# EAGLE board ping_breakout (EAGLE 5.11)
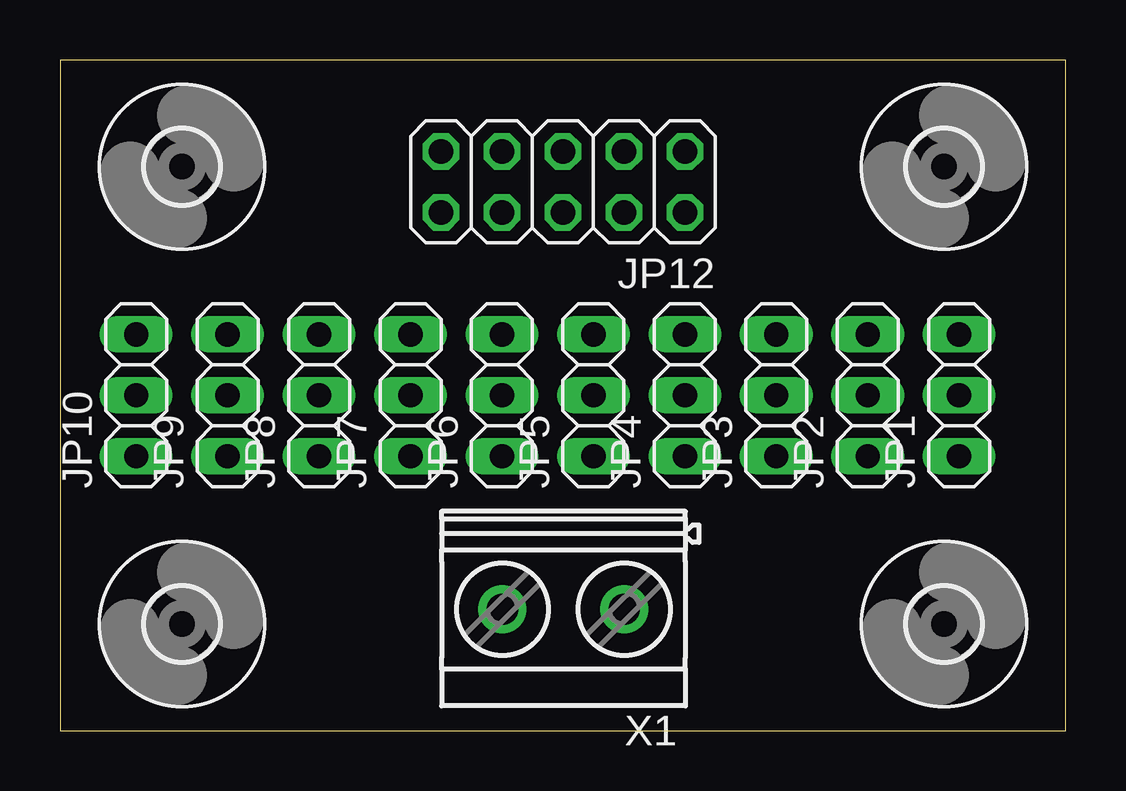
[diagram p0: board, top side]
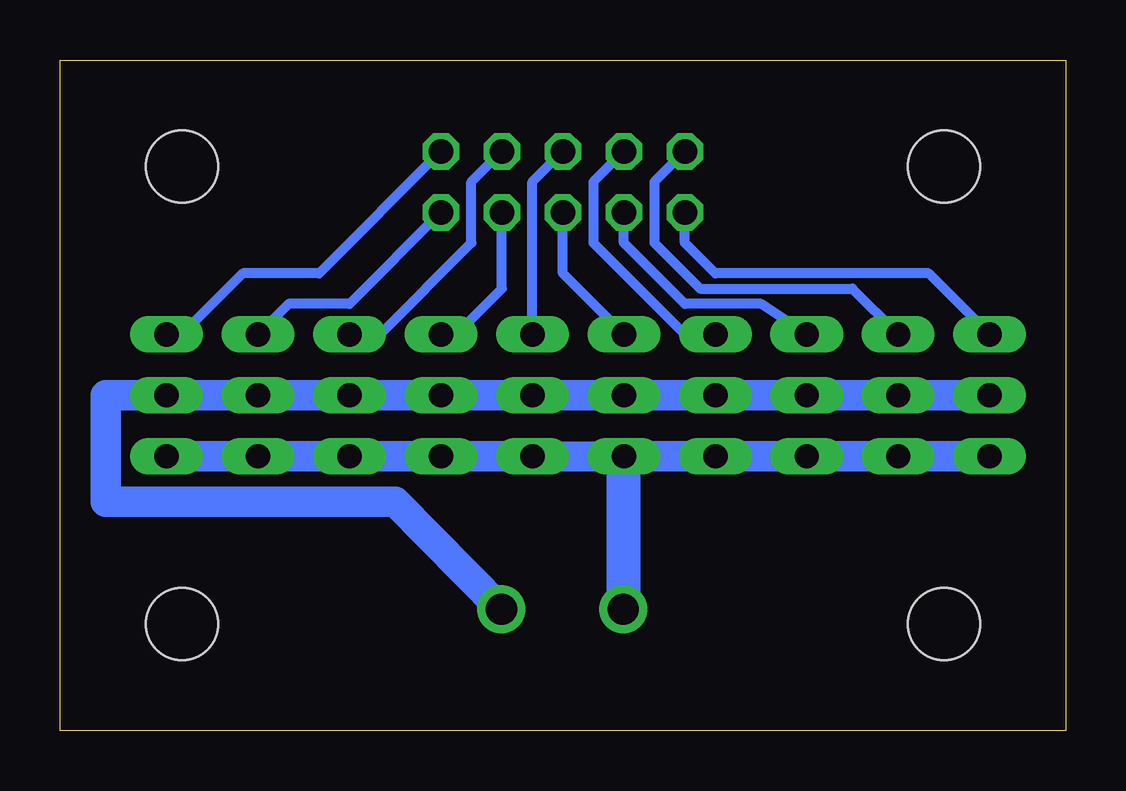
[diagram p1: board, bottom side, seen from below]

Size 41.91 x 27.94 mm. Coordinates in mm from the lower left corner, seen from the top.
Outline: 0,0 41.91,0 41.91,27.94 0,27.94 0,0
Copper layers (1*16): Top 0.035mm / dielectric 1.5mm / Bottom 0.035mm
Design rules "default": minimum track width 10mil, minimum drill 24mil, track to track 8mil, track to pad 8mil, pad to pad 8mil, via to via 8mil, smd to smd 8mil, copper to edge 40mil, drill to drill 8mil, minimum pad ring 10mil, minimum via ring 8mil, stop-mask expansion 4mil, vias tented up to drill 0mil, thermal gap 10mil

## Footprints (pad centres in the part's own frame; a part is rotated, then mirrored left to right if it is on the bottom)
1X03 = drill 1.016 long: 1 -2.54,0; 2 0,0; 3 2.54,0
2X05 = drill 1.016 octagon: 1 -5.08,-1.27; 2 -5.08,1.27; 3 -2.54,-1.27; 4 -2.54,1.27; 5 0,-1.27; 6 0,1.27; 7 2.54,-1.27; 8 2.54,1.27; 9 5.08,-1.27; 10 5.08,1.27
3,0 = hole 3: 0,0
MKDSN1,5/2-5,08 = drill 1.3 pad 2 round: 1 -2.561,0.025; 2 2.519,0.025

## Placement (x,y rotation side)
JP1  [1X03]  37.47,13.97 90 top
JP2  [1X03]  33.66,13.97 90 top
JP3  [1X03]  29.84,13.97 90 top
JP4  [1X03]  26.04,13.97 90 top
JP5  [1X03]  22.23,13.97 90 top
JP6  [1X03]  18.41,13.97 90 top
JP7  [1X03]  14.61,13.97 90 top
JP8  [1X03]  10.79,13.97 90 top
JP9  [1X03]  6.99,13.97 90 top
JP10  [1X03]  3.17,13.97 90 top
JP12  [2X05]  20.95,22.86 180 top
U$1  [3,0]  5.08,4.45 0 top
U$2  [3,0]  5.08,23.5 0 top
U$3  [3,0]  36.83,4.45 0 top
U$4  [3,0]  36.83,23.5 0 top
X1  [MKDSN1,5/2-5,08]  20.95,5.08 180 top

## Library data of the parts
JP1-JP10 JP12 = pinhead
U$1-U$4 = holes
X1 = con-phoenix-508; MPN: MKDSN 1,5/2-5.08; OC_FARNELL: 1792903; OC_NEWARK: 30M2397

## Nets
+5V: JP1.2 JP2.2 JP3.2 JP4.2 JP5.2 JP6.2 JP7.2 JP8.2 JP9.2 JP10.2 X1.1
GND: JP1.1 JP2.1 JP3.1 JP4.1 JP5.1 JP6.1 JP7.1 JP8.1 JP9.1 JP10.1 X1.2
PING0: JP1.3 JP12.1
PING1: JP2.3 JP12.2
PING2: JP3.3 JP12.3
PING3: JP4.3 JP12.4
PING4: JP5.3 JP12.5
PING5: JP6.3 JP12.6
PING6: JP7.3 JP12.7
PING7: JP8.3 JP12.8
PING8: JP9.3 JP12.9
PING9: JP10.3 JP12.10

## Tracks (layer width: path | path; a pad name or v marks a point on that pad's centre or on a via)
+5V
  Bottom 1.27: JP10.2 JP9.2 JP8.2 JP7.2 JP6.2 JP5.2 JP4.2 JP3.2 JP2.2 JP1.2 40.01,13.97 40.01,9.53 27.94,9.53 X1.1
GND
  Bottom 0.55: JP6.1 18.44,11.41
  Bottom 1.27: JP10.1 JP9.1 JP8.1 JP7.1 JP6.1 | 18.44,11.41 JP5.1 JP4.1 JP3.1 JP2.1 JP1.1
  Bottom 1.422: 18.44,11.41 X1.2
PING0
  Bottom 0.406: JP12.1 31.11,19.05 34.29,19.05 36.83,16.51 JP1.3
PING1
  Bottom 0.406: JP12.2 29.84,17.78 32.38,17.78 JP2.3
PING2
  Bottom 0.406: JP3.3 28.57,16.51 24.77,20.32 24.77,22.86 JP12.3
PING3
  Bottom 0.406: JP12.4 23.5,18.41 25.4,16.51 JP4.3
PING4
  Bottom 0.406: JP5.3 22.23,22.86 JP12.5
PING5
  Bottom 0.406: JP6.3 20.95,19.05 JP12.6
PING6
  Bottom 0.406: JP12.7 19.68,22.86 19.68,20.32 15.88,16.51 JP7.3
PING7
  Bottom 0.406: JP8.3 12.7,17.78 15.88,17.78 18.41,20.32 JP12.8
PING8
  Bottom 0.406: JP9.3 8.89,18.41 15.24,18.41 17.14,20.32 17.14,22.86 JP12.9
PING9
  Bottom 0.406: JP10.3 5.71,19.05 14.61,19.05 15.88,20.32 JP12.10